# Altium PCB MT7688.PcbDoc (part 2 of 2)
Units mm, origin at the board's own origin, x right, y up, seen from the top; angles counter-clockwise.
Board outline 88.82 x 86.16 mm, 4 copper layers (Top Layer, GND, Layer 3, Bottom Layer), stack 0.603 mm thick; 138 components, 120 nets, 535 pads, 66 vias.
Unrouted connection lines stored in the file: 288.
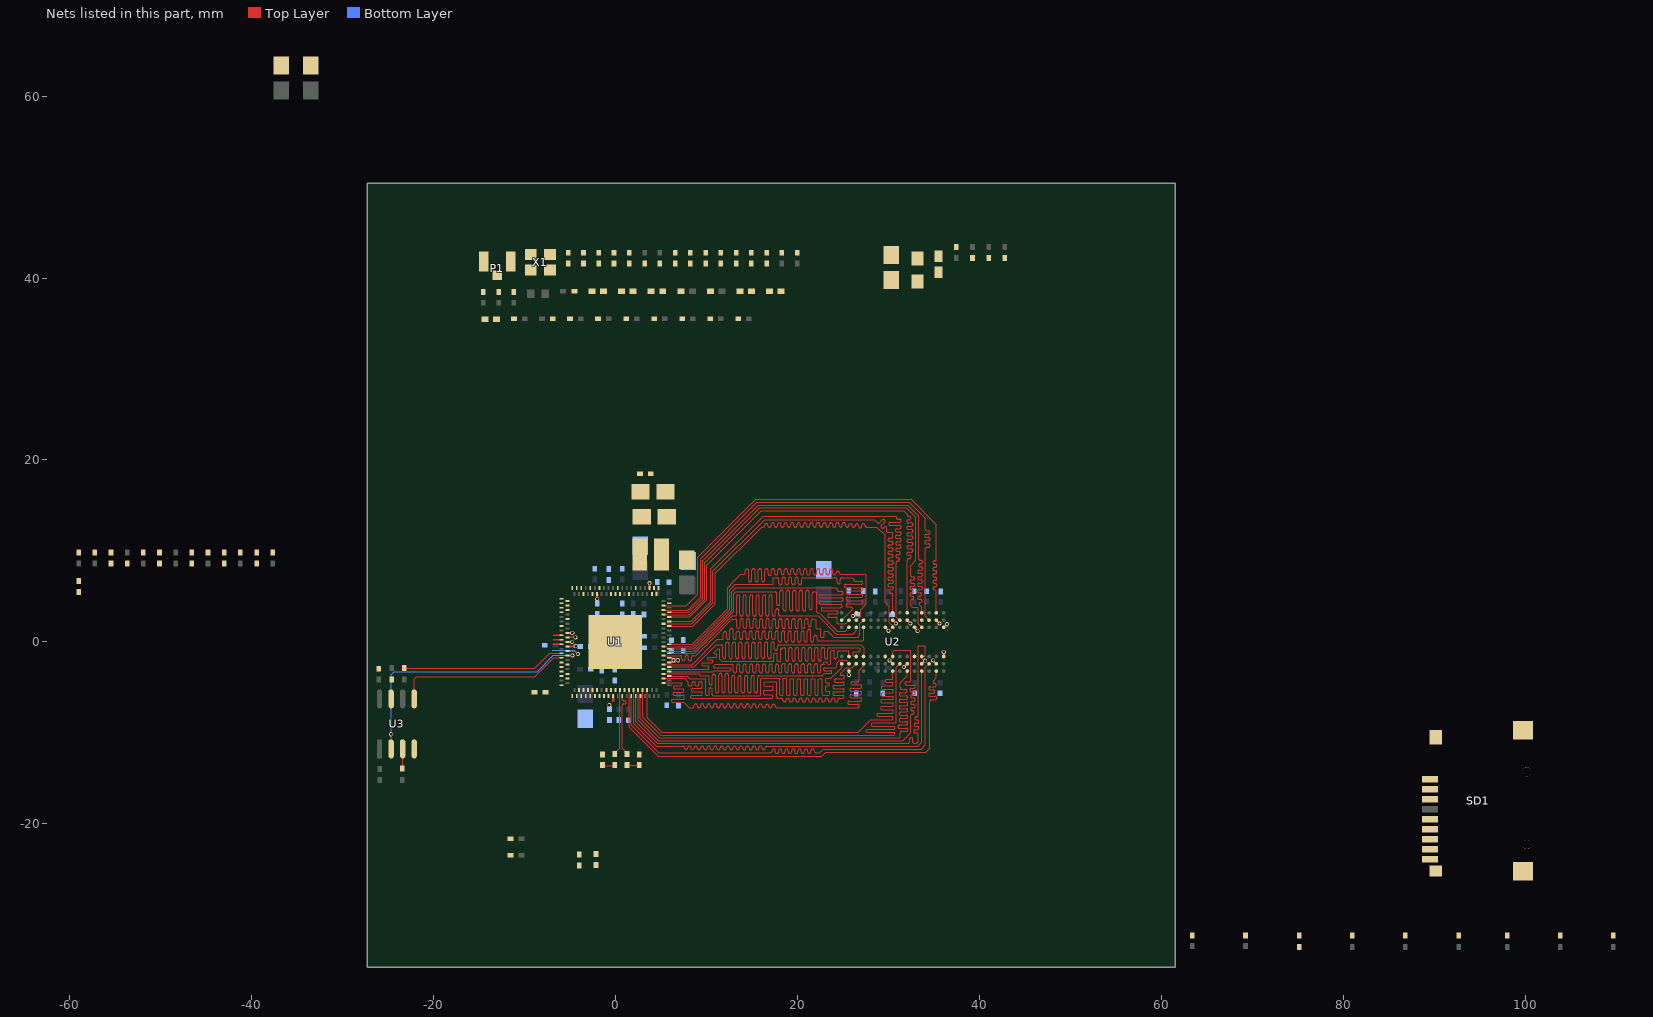
[diagram p3: the nets of this part, all layers, seen from the top]

## Via types
v1: diameter 0.45, hole 0.25, Top Layer to Bottom Layer, tented both sides, 66 vias

## Nets (pads, with @x,y where several pads share a name; then routed paths per layer and width w, separated by ;. In a path a pad name is that pad's centre, name@x,y a point inside that pad or via, vN(x,y) a via of type N, cw(c..) or ccw(c..) an arc to the next point about the centre after c; other vN are vias at no path point) (continued)
GND: C1.1 C2.1 C3.1 C4.2 C5.1 C6.1 C7.1 C8.1 C9.1 C12.1 C13.1 C14.1 C15.2 C18.2 C19.2 C20.2 C21.1 C22.1 C23.1 C24.2 C25.2 C26.2 C27.2 C28.2 C29.2 C30.2 C31.2 C32.2 C33.2 C34.2 C35.2 C36.2 C37.2 C38.2 C39.2 C40.2 C41.2 C42.2 C43.2 C44.2 C45.2 C46.2 C47.2 C48.2 C49.2 C50.2 C51.2 C52.2 C53.1 C54.2 C55.2 C56.2 C57.2 C59.2 C60.2 C61.2 C62.2 C63.2 C64.2 C65.2 C66.2 D2.K L3.2 P1.1 P1.3 R6.1 R9.1 R10.1 R11.1 R12.1 R15.2 R17.2 R26.1 R28.1 R31.1 R32.1 R34.1 R36.1 R38.1 SD1.0 SD1.6 TC1.2 TC2.2 TC3.2 TC4.2 TC5.2 TC6.2 TC7.2 TC8.2 TC9.2 TC10.2 U1.1 U1.2 U1.7 U1.10 U1.13 U1.63 U1.115 U1.120 U1.121 U1.128 U1.152 U1.156 U1.157 U2.A3 U2.A7 U2.B2 U2.B8 U2.D2 U2.D8 U2.E3 U2.E7 U2.F2 U2.F8 U2.H2 U2.H8 U2.J3 U2.J7 U2.N1 U2.P9 U3.4 X1.1 X1.2 X1.4 | length 6.3
  Top Layer w0.102: v1(25.663,-3.616) 25.68,-3.599 U2.P9@25.68,-3.2
  Top Layer w0.254: v1@26.135,2.855 U2.N1@26.48,3.2 ; U2.J3@29.68,1.6 v1@30.025,1.255 ; v1@30.135,-2.055 U2.H8@30.48,-2.4 ; U2.H2@30.48,2.4 v1@30.825,2.055 ; v1@31.735,-2.745 U2.F8@32.08,-2.4 ; U2.F2@32.08,2.4 32.425,2.055 v1(32.425,2.025) ; U2.E3@32.88,1.6 v1@33.225,1.255 ; U2.D8@33.68,-2.4 v1@34.025,-2.055 ; v1@34.935,-2.055 U2.B8@35.28,-2.4 ; U2.B2@35.28,2.4 35.621,2.059 v1(35.621,2.032) ; U2.A7@36.08,-1.6 v1@36.08,-1.112 ; U2.A3@36.08,1.6 v1@36.425,1.945
  other v1: 31.705,-2.745 34.055,-2.055 30.135,-2.025 34.935,-2.025 36.101,-1.091 30.025,1.225 33.225,1.225 36.455,1.945 30.825,2.025 26.105,2.855
GPIO_0: U1.29
I2C_SCLK: R5.1 U1.20 | length 0.5
  Top Layer w0.152: U1.20@-5.275,0 v1@-4.763,0
  other v1: -4.753,0.01
I2C_SD: R4.1 U1.21 | length 0.9
  Top Layer w0.152: -6.824,-0.251 -6.822,-0.25 U1.21@-5.925,-0.25
I2S_CLK: U1.19 | length 0.9
  Top Layer w0.152: -6.822,0.25 U1.19@-5.925,0.25
I2S_DI: U1.16 | length 0.5
  Top Layer w0.152: U1.16@-5.275,1 -5.265,0.99 -4.752,0.99 v1(-4.742,0.999)
I2S_DO: R37.2 R38.2 U1.17 | length 0.9
  Top Layer w0.152: -6.822,0.75 U1.17@-5.925,0.75
I2S_WS: U1.18 | length 0.9
  Top Layer w0.152: U1.18@-5.275,0.5 -4.41,0.5 v1@-4.407,0.497
  other v1: -4.397,0.503
MADDR0: U1.80 U2.M8 | length 50.8
  Top Layer w0.102: U1.80@5.275,-4.5 7.248,-4.5 7.308,-4.56 7.308,-4.782 7.248,-4.841 6.534,-4.841 ccw(c6.534,-4.943) 6.433,-4.943 6.433,-5.065 ccw(c6.534,-5.065) 6.534,-5.166 7.453,-5.166 7.512,-5.226 7.512,-5.487 7.453,-5.546 6.464,-5.546 ccw(c6.464,-5.648) 6.363,-5.648 6.363,-5.77 ccw(c6.464,-5.77) 6.464,-5.871 7.488,-5.871 cw(c7.488,-5.973) 7.59,-5.974 7.59,-6.198 cw(c7.488,-6.199) 7.488,-6.3 6.249,-6.3 6.19,-6.36 6.19,-6.566 6.249,-6.626 7.516,-6.626 7.675,-6.785 8.08,-7.19 ccw(c8.152,-7.118) 8.152,-7.22 8.442,-7.22 8.493,-7.22 ccw(c8.493,-7.042) 8.67,-7.042 8.67,-6.985 cw(c8.848,-6.985) 9.026,-6.985 9.026,-7.043 ccw(c9.204,-7.043) 9.382,-7.043 9.382,-6.985 cw(c9.559,-6.985) 9.737,-6.985 9.737,-7.043 ccw(c9.915,-7.043) 10.093,-7.043 10.093,-6.985 cw(c10.271,-6.985) 10.448,-6.985 10.448,-7.043 ccw(c10.626,-7.043) 10.804,-7.043 10.804,-6.985 cw(c10.982,-6.985) 11.16,-6.985 11.16,-7.043 ccw(c11.337,-7.043) 11.515,-7.043 11.515,-6.985 cw(c11.693,-6.985) 11.871,-6.985 11.871,-7.043 ccw(c12.049,-7.043) 12.226,-7.043 12.226,-6.985 cw(c12.404,-6.985) 12.582,-6.985 12.582,-7.043 ccw(c12.76,-7.043) 12.938,-7.043 12.938,-6.985 cw(c13.115,-6.985) 13.293,-6.985 13.293,-7.043 ccw(c13.471,-7.043) 13.649,-7.043 13.649,-6.985 cw(c13.827,-6.985) 14.004,-6.985 14.004,-7.043 ccw(c14.182,-7.043) 14.36,-7.043 14.36,-6.985 cw(c14.538,-6.985) 14.716,-6.985 14.716,-7.043 ccw(c14.893,-7.043) 15.071,-7.043 15.071,-6.985 cw(c15.249,-6.985) 15.427,-6.985 15.427,-7.043 ccw(c15.605,-7.043) 15.782,-7.043 15.782,-7.001 cw(c15.96,-7.001) 16.138,-7.001 16.138,-7.043 ccw(c16.316,-7.043) 16.494,-7.043 cw(c16.671,-7.043) 16.849,-7.043 ccw(c17.027,-7.043) 17.205,-7.043 ; 17.205,-7.042 cw(c17.383,-7.042) 17.56,-7.042 ccw(c17.738,-7.042) 17.738,-7.22 18.376,-7.22 26.694,-7.22 ccw(c26.694,-7.118) 26.781,-7.172 ccw(c26.694,-7.118) 26.796,-7.121 26.796,-7.118 26.796,-7.032 ccw(c26.618,-7.032) 26.618,-6.854 25.705,-6.854 cw(c25.705,-6.676) 25.705,-6.499 26.929,-6.499 ccw(c26.929,-6.321) 26.929,-6.143 25.952,-6.143 cw(c25.952,-5.965) 25.952,-5.787 26.929,-5.787 ccw(c26.929,-5.61) 26.929,-5.432 25.952,-5.432 cw(c25.952,-5.254) 25.952,-5.076 26.929,-5.076 ccw(c26.929,-4.898) 26.929,-4.721 26.076,-4.721 cw(c26.076,-4.543) 26.076,-4.365 26.618,-4.365 ccw(c26.618,-4.187) 26.796,-4.187 26.796,-3.171 cw(c26.897,-3.171) 26.802,-3.137 cw(c26.897,-3.171) 26.825,-3.1 27.193,-2.732 ccw(c27.121,-2.66) 27.223,-2.66 27.223,-2.457 U2.M8@27.28,-2.4
MADDR1: U1.88 U2.M3 | length 50.8
  Top Layer w0.102: U1.88@5.276,-2.499 8.425,-2.499 11.203,0.279 11.643,0.279 11.694,0.279 ccw(c11.694,0.456) 11.872,0.456 11.872,0.953 cw(c12.05,0.953) 12.228,0.953 12.228,0.456 ccw(c12.405,0.456) 12.583,0.456 12.583,1.308 cw(c12.761,1.308) 12.939,1.308 12.939,0.456 ccw(c13.117,0.456) 13.294,0.456 13.294,1.01 cw(c13.472,1.01) 13.65,1.01 13.65,0.456 ccw(c13.828,0.456) 14.006,0.456 14.006,1.01 cw(c14.183,1.01) 14.361,1.01 14.361,0.456 ccw(c14.539,0.456) 14.717,0.456 14.717,1.01 cw(c14.895,1.01) 15.072,1.01 15.072,0.456 ccw(c15.25,0.456) 15.428,0.456 15.428,1.01 cw(c15.606,1.01) 15.784,1.01 15.784,0.456 ccw(c15.961,0.456) 16.139,0.456 16.139,1.01 cw(c16.317,1.01) 16.495,1.01 16.495,0.456 ccw(c16.673,0.456) 16.85,0.456 16.85,1.01 cw(c17.028,1.01) 17.206,1.01 17.206,0.456 ccw(c17.384,0.456) 17.562,0.456 17.562,1.01 cw(c17.739,1.01) 17.917,1.01 17.917,0.17 ccw(c18.095,0.17) 18.273,0.17 18.273,1.01 cw(c18.451,1.01) 18.628,1.01 18.628,0.17 ccw(c18.806,0.17) 18.984,0.17 18.984,1.01 cw(c19.162,1.01) 19.34,1.01 19.34,0.17 ccw(c19.517,0.17) 19.695,0.17 19.695,1.01 cw(c19.873,1.01) 20.051,1.01 20.051,0.17 ccw(c20.229,0.17) 20.406,0.17 20.406,1.01 cw(c20.584,1.01) 20.762,1.01 20.762,0.17 ccw(c20.94,0.17) 21.118,0.17 21.118,1.201 cw(c21.295,1.201) 21.473,1.201 21.473,0.17 ccw(c21.651,0.17) 21.829,0.17 21.829,0.536 cw(c22.007,0.536) 22.184,0.536 22.184,0.292 ccw(c22.362,0.292) 22.362,0.114 23.66,0.114 27.205,0.114 27.28,0.189 U2.M3@27.28,1.6
MADDR2: U1.87 U2.M7 | length 50.8
  Top Layer w0.102: U1.87@5.925,-2.75 8.674,-2.75 11.112,-0.312 11.209,-0.312 ; 11.21,-0.312 11.616,-0.312 cw(c11.616,-0.49) 11.794,-0.49 11.794,-1.654 ccw(c11.971,-1.654) 12.149,-1.654 12.149,-0.204 cw(c12.327,-0.204) 12.505,-0.204 12.505,-1.654 ccw(c12.683,-1.654) 12.86,-1.654 12.86,-0.204 cw(c13.038,-0.204) 13.216,-0.204 13.216,-1.654 ccw(c13.394,-1.654) 13.572,-1.654 13.572,-0.204 cw(c13.749,-0.204) 13.927,-0.204 13.927,-1.654 ccw(c14.105,-1.654) 14.283,-1.654 14.283,-0.204 cw(c14.461,-0.204) 14.638,-0.204 14.638,-1.654 ccw(c14.816,-1.654) 14.994,-1.654 14.994,-0.204 cw(c15.172,-0.204) 15.35,-0.204 15.35,-1.654 ccw(c15.527,-1.654) 15.705,-1.654 15.705,-0.204 cw(c15.883,-0.204) 16.061,-0.204 16.061,-1.654 ccw(c16.239,-1.654) 16.416,-1.654 16.416,-0.204 cw(c16.594,-0.204) 16.772,-0.204 16.772,-1.654 ccw(c16.95,-1.654) 17.128,-1.654 17.128,-0.204 cw(c17.305,-0.204) 17.483,-0.204 17.483,-0.734 ccw(c17.661,-0.734) 17.839,-0.734 17.839,-0.49 cw(c18.017,-0.49) 18.017,-0.312 19.243,-0.312 26.991,-0.312 27.25,-0.571 cw(c27.178,-0.643) 27.28,-0.643 U2.M7@27.28,-1.6
MADDR3: U1.97 U2.N2 | length 50.8
  Top Layer w0.102: U1.97@5.925,-0.25 5.938,-0.263 8.429,-0.263 12.332,3.64 12.332,5.983 13.016,6.667 13.786,7.437 14.072,7.437 14.122,7.437 ccw(c14.122,7.615) 14.3,7.615 14.3,7.835 cw(c14.478,7.835) 14.656,7.835 14.656,6.816 ccw(c14.834,6.816) 15.011,6.816 15.011,7.869 cw(c15.189,7.869) 15.367,7.869 15.367,6.816 ccw(c15.545,6.816) 15.723,6.816 15.723,7.869 cw(c15.9,7.869) 16.078,7.869 16.078,6.816 ccw(c16.256,6.816) 16.434,6.816 16.434,7.869 cw(c16.612,7.869) 16.789,7.869 16.789,7.484 ccw(c16.967,7.484) 17.145,7.484 17.145,7.869 cw(c17.323,7.869) 17.501,7.869 17.501,7.559 ccw(c17.678,7.559) 17.856,7.559 17.856,7.869 cw(c18.034,7.869) 18.212,7.869 18.212,7.589 ccw(c18.39,7.589) 18.567,7.589 18.567,7.869 cw(c18.745,7.869) 18.923,7.869 18.923,7.589 ccw(c19.101,7.589) 19.279,7.589 19.279,7.869 cw(c19.456,7.869) 19.634,7.869 19.634,7.589 ccw(c19.812,7.589) 19.99,7.589 19.99,7.869 cw(c20.168,7.869) 20.345,7.869 20.345,7.559 ccw(c20.523,7.559) 20.701,7.559 20.701,7.869 cw(c20.879,7.869) 21.057,7.869 21.057,7.559 ccw(c21.234,7.559) 21.412,7.559 21.412,7.869 cw(c21.59,7.869) 21.768,7.869 21.768,7.559 ccw(c21.946,7.559) 22.123,7.559 22.123,7.869 cw(c22.301,7.869) 22.479,7.869 22.479,7.559 ccw(c22.657,7.559) 22.835,7.559 22.835,7.869 cw(c23.012,7.869) 23.19,7.869 23.19,7.559 ccw(c23.368,7.559) 23.546,7.559 23.546,7.835 cw(c23.724,7.835) 23.901,7.835 23.901,7.559 ccw(c24.079,7.559) 24.257,7.559 24.257,7.615 cw(c24.435,7.615) 24.613,7.615 ccw(c24.79,7.615) 24.79,7.437 26.387,7.438 26.438,7.438 27.602,7.438 27.602,4.217 26.948,3.562 26.948,2.868 U2.N2@26.48,2.4
MADDR4: U1.82 U2.N8 | length 51.1
  Top Layer w0.102: U1.82@5.275,-4 7.621,-4 8.03,-4.409 8.03,-4.728 ccw(c8.132,-4.728) 8.132,-4.83 8.325,-4.83 ccw(c8.325,-4.728) 8.427,-4.728 8.427,-4.459 cw(c8.529,-4.459) 8.529,-4.357 8.689,-4.357 cw(c8.689,-4.459) 8.791,-4.459 8.791,-4.732 ccw(c8.893,-4.731) 8.893,-4.832 9.061,-4.832 ccw(c9.061,-4.731) 9.163,-4.731 9.163,-4.473 cw(c9.265,-4.473) 9.265,-4.371 9.426,-4.371 cw(c9.426,-4.473) 9.528,-4.473 9.528,-4.999 cw(c9.426,-4.999) 9.426,-5.1 8.479,-5.1 ccw(c8.479,-5.202) 8.377,-5.202 8.377,-5.38 ccw(c8.479,-5.38) 8.479,-5.481 9.487,-5.481 9.547,-5.541 9.547,-5.781 9.487,-5.841 8.414,-5.841 ccw(c8.414,-5.942) 8.312,-5.942 8.312,-6.096 ccw(c8.414,-6.095) 8.414,-6.197 10.763,-6.197 15.865,-6.197 17.19,-6.196 ccw(c17.189,-6.095) 17.291,-6.097 17.291,-5.886 17.189,-5.785 16.42,-5.785 cw(c16.42,-5.683) 16.318,-5.683 16.318,-5.424 cw(c16.42,-5.424) 16.42,-5.323 17.234,-5.323 ccw(c17.234,-5.221) 17.335,-5.22 17.335,-4.994 17.234,-4.892 16.42,-4.892 16.36,-4.833 16.36,-4.454 16.42,-4.394 17.65,-4.394 17.752,-4.496 17.752,-6.096 ccw(c17.854,-6.096) 17.849,-6.197 ccw(c17.854,-6.096) 17.854,-6.197 17.899,-6.197 18.242,-6.197 cw(c18.242,-6.375) 18.42,-6.375 18.42,-6.386 ccw(c18.598,-6.386) 18.776,-6.386 18.776,-6.375 cw(c18.953,-6.375) 19.131,-6.375 19.131,-6.418 ccw(c19.309,-6.418) 19.487,-6.418 19.487,-6.375 cw(c19.665,-6.375) 19.842,-6.375 19.842,-6.418 ccw(c20.02,-6.418) 20.198,-6.418 20.198,-6.375 cw(c20.376,-6.375) 20.554,-6.375 20.554,-6.418 ccw(c20.731,-6.418) 20.909,-6.418 20.909,-6.375 cw(c21.087,-6.375) 21.265,-6.375 21.265,-6.418 ccw(c21.443,-6.418) 21.62,-6.418 21.62,-6.375 cw(c21.798,-6.375) 21.976,-6.375 21.976,-6.418 ccw(c22.154,-6.418) 22.332,-6.418 22.332,-6.375 cw(c22.509,-6.375) 22.687,-6.375 22.687,-6.418 ccw(c22.865,-6.418) 23.043,-6.418 23.043,-6.375 cw(c23.221,-6.375) 23.398,-6.375 23.398,-6.418 ccw(c23.576,-6.418) 23.754,-6.418 23.754,-6.36 cw(c23.932,-6.36) 24.11,-6.36 24.11,-6.418 ccw(c24.287,-6.418) 24.465,-6.418 24.465,-6.375 cw(c24.643,-6.375) 24.643,-6.197 24.694,-6.197 24.967,-6.197 25.149,-6.016 ; 25.149,-6.066 25.149,-6.016 ; 25.149,-3.633 25.149,-3.882 ; 25.701,-2.848 26.032,-2.848 U2.N8@26.48,-2.4 ; 25.701,-2.845 25.361,-2.845 24.721,-3.484 ccw(c24.793,-3.556) 24.793,-3.658 24.97,-3.658 cw(c24.971,-3.911) 25.101,-3.694 cw(c25.048,-3.781) 25.15,-3.781 25.15,-3.866 cw(c25.048,-3.866) 25.149,-3.882 ; 25.149,-6.016 ccw(c24.971,-6.016) 24.971,-5.838 24.056,-5.838 cw(c24.056,-5.66) 24.056,-5.482 24.987,-5.482 ccw(c24.987,-5.304) 24.987,-5.127 24.056,-5.127 cw(c24.056,-4.949) 24.056,-4.771 24.987,-4.771 ccw(c24.987,-4.593) 24.987,-4.415 24.252,-4.415 cw(c24.252,-4.238) 24.252,-4.06 24.971,-4.06 ccw(c24.971,-3.882) 25.149,-3.882
MADDR5: U1.93 U2.N3 | length 50.8
  Top Layer w0.102: U1.93@5.925,-1.25 8.737,-1.25 12.84,2.854 13.105,2.854 13.156,2.854 ccw(c13.156,3.031) 13.334,3.031 13.334,4.979 cw(c13.511,4.979) 13.689,4.979 13.689,3.022 ccw(c13.867,3.022) 14.045,3.022 14.045,4.982 cw(c14.223,4.982) 14.4,4.982 14.4,3.022 ccw(c14.578,3.022) 14.756,3.022 14.756,4.982 cw(c14.934,4.982) 15.112,4.982 15.112,3.022 ccw(c15.289,3.022) 15.467,3.022 15.467,4.982 cw(c15.645,4.982) 15.823,4.982 15.823,3.022 ccw(c16.001,3.022) 16.178,3.022 16.178,4.982 cw(c16.356,4.982) 16.534,4.982 16.534,3.022 ccw(c16.712,3.022) 16.89,3.022 16.89,4.982 cw(c17.067,4.982) 17.245,4.982 17.245,3.022 ccw(c17.423,3.022) 17.601,3.022 17.601,3.45 cw(c17.779,3.45) 17.956,3.45 17.956,3.031 ccw(c18.134,3.031) 18.134,2.854 18.482,2.854 22.288,2.854 24.298,0.845 26.082,0.845 26.48,1.243 U2.N3@26.48,1.6
MADDR6: U1.86 U2.N7 | length 51.1
  Top Layer w0.102: U1.86@5.275,-3 5.276,-3.001 10.207,-3.001 10.267,-2.941 10.267,-2.671 10.207,-2.611 9.61,-2.611 9.55,-2.552 9.55,-2.363 9.61,-2.304 10.667,-2.304 10.726,-2.244 10.726,-2.029 10.667,-1.97 10.195,-1.97 10.136,-1.91 10.136,-1.719 10.195,-1.66 11.096,-1.66 11.156,-1.6 11.156,-1.342 11.096,-1.283 10.908,-1.283 10.848,-1.223 10.848,-1.139 11.232,-0.756 11.429,-0.756 11.489,-0.815 11.489,-1.884 11.742,-2.137 17.401,-2.137 17.432,-2.105 17.432,-1.276 17.492,-1.217 17.728,-1.217 17.788,-1.276 17.788,-2.087 17.847,-2.146 18.115,-2.146 18.175,-2.087 18.175,-0.718 18.261,-0.631 18.44,-0.631 ; 18.229,-0.843 18.44,-0.631 ; U2.N7@26.48,-1.6 26.447,-1.567 26.209,-1.567 26.149,-1.508 26.149,-1.135 26.212,-1.073 26.843,-1.073 26.902,-1.014 26.902,-0.765 26.769,-0.631 25.793,-0.631 24.138,-0.631 23.525,-0.631 ccw(c23.525,-0.809) 23.347,-0.809 23.347,-1.674 cw(c23.169,-1.674) 22.991,-1.674 22.991,-0.795 ccw(c22.813,-0.795) 22.636,-0.795 22.636,-1.924 cw(c22.458,-1.924) 22.28,-1.924 22.28,-0.795 ccw(c22.102,-0.795) 21.924,-0.795 21.924,-1.924 cw(c21.747,-1.924) 21.569,-1.924 21.569,-0.795 ccw(c21.391,-0.795) 21.213,-0.795 21.213,-1.924 cw(c21.035,-1.924) 20.858,-1.924 20.858,-0.795 ccw(c20.68,-0.795) 20.502,-0.795 20.502,-1.924 cw(c20.324,-1.924) 20.146,-1.924 20.146,-0.795 ccw(c19.969,-0.795) 19.791,-0.795 19.791,-1.924 cw(c19.613,-1.924) 19.435,-1.924 19.435,-0.795 ccw(c19.257,-0.795) 19.08,-0.795 19.08,-1.924 cw(c18.902,-1.924) 18.724,-1.924 18.724,-0.809 ccw(c18.546,-0.809) 18.546,-0.631 18.44,-0.631
MADDR7: U1.95 U2.P2 | length 44
  Top Layer w0.102: U1.95@5.925,-0.75 5.932,-0.743 8.596,-0.743 12.789,3.45 12.789,5.535 13.232,5.978 21.028,5.978 24.296,5.978 24.347,5.978 24.407,5.918 24.407,5.791 24.407,5.74 ccw(c24.585,5.74) 24.585,5.563 24.864,5.563 cw(c24.864,5.385) 24.864,5.207 22.596,5.207 ccw(c22.596,5.029) 22.596,4.851 24.864,4.851 cw(c24.864,4.674) 24.864,4.496 22.596,4.496 ccw(c22.596,4.318) 22.596,4.14 24.748,4.14 cw(c24.748,3.962) 24.748,3.785 22.789,3.785 ccw(c22.789,3.607) 22.789,3.429 24.321,3.429 cw(c24.321,3.251) 24.321,3.073 23.501,3.073 ccw(c23.501,2.896) 23.501,2.718 24.229,2.718 cw(c24.229,2.54) 24.407,2.54 24.407,2.196 24.407,2.042 24.466,1.982 25.262,1.982 U2.P2@25.68,2.4
MADDR8: U1.84 U2.P8 | length 50.8
  Top Layer w0.102: U1.84@5.275,-3.5 9.192,-3.5 9.39,-3.698 9.859,-3.698 10.126,-3.698 cw(c10.126,-3.876) 10.304,-3.876 10.304,-4.538 ccw(c10.482,-4.538) 10.66,-4.538 10.66,-3.733 cw(c10.837,-3.733) 11.015,-3.733 11.015,-5.407 ccw(c11.193,-5.407) 11.371,-5.407 11.371,-3.64 cw(c11.549,-3.64) 11.726,-3.64 11.726,-5.407 ccw(c11.904,-5.407) 12.082,-5.407 12.082,-3.64 cw(c12.26,-3.64) 12.438,-3.64 12.438,-5.407 ccw(c12.615,-5.407) 12.793,-5.407 12.793,-3.877 cw(c12.971,-3.877) 13.149,-3.877 13.149,-5.407 ccw(c13.327,-5.407) 13.504,-5.407 13.504,-3.877 cw(c13.682,-3.877) 13.86,-3.877 13.86,-5.407 ccw(c14.038,-5.407) 14.216,-5.407 14.216,-3.877 cw(c14.393,-3.877) 14.571,-3.877 14.571,-5.407 ccw(c14.749,-5.407) 14.927,-5.407 14.927,-3.877 cw(c15.105,-3.877) 15.282,-3.877 15.282,-5.407 ccw(c15.46,-5.407) 15.638,-5.407 15.638,-3.876 cw(c15.816,-3.876) 15.816,-3.698 15.867,-3.698 15.978,-3.698 cw(c15.978,-3.8) 15.982,-3.698 ccw(c16.004,-3.216) 16.025,-3.698 cw(c16.03,-3.8) 16.03,-3.698 16.689,-3.698 cw(c16.689,-3.8) 16.694,-3.698 ccw(c16.715,-3.216) 16.737,-3.698 cw(c16.741,-3.8) 16.741,-3.698 17.4,-3.698 cw(c17.4,-3.8) 17.405,-3.698 ccw(c17.426,-3.216) 17.448,-3.698 cw(c17.452,-3.8) 17.452,-3.698 18.112,-3.698 cw(c18.112,-3.8) 18.116,-3.698 ccw(c18.138,-3.216) 18.159,-3.698 cw(c18.164,-3.8) 18.164,-3.698 18.823,-3.698 cw(c18.823,-3.8) 18.827,-3.698 ccw(c18.849,-3.216) 18.87,-3.698 cw(c18.875,-3.8) 18.875,-3.698 19.534,-3.698 cw(c19.534,-3.8) 19.538,-3.698 ccw(c19.56,-3.216) 19.581,-3.698 cw(c19.586,-3.8) 19.586,-3.698 20.245,-3.698 cw(c20.245,-3.8) 20.25,-3.698 ccw(c20.271,-3.216) 20.293,-3.698 cw(c20.297,-3.8) 20.297,-3.698 20.956,-3.698 cw(c20.956,-3.8) 20.961,-3.698 ccw(c20.982,-3.216) 21.004,-3.698 cw(c21.008,-3.8) 21.008,-3.698 21.668,-3.698 cw(c21.668,-3.8) 21.672,-3.698 ccw(c21.694,-3.216) 21.715,-3.698 cw(c21.72,-3.8) 21.72,-3.698 22.379,-3.698 cw(c22.379,-3.8) 22.383,-3.698 ccw(c22.405,-3.216) 22.426,-3.698 cw(c22.431,-3.8) 22.431,-3.698 22.705,-3.698 ccw(c22.705,-3.597) 22.777,-3.668 22.978,-3.467 23.686,-3.467 ccw(c23.686,-3.365) 23.788,-3.365 23.788,-3.262 ccw(c23.686,-3.261) 23.686,-3.16 23.026,-3.16 cw(c23.026,-3.058) 22.925,-3.058 22.925,-2.912 cw(c23.026,-2.912) 23.026,-2.811 24.256,-2.811 24.333,-2.733 24.333,-2.323 24.661,-1.995 25.362,-1.995 25.479,-2.112 25.479,-2.118 25.68,-2.319 U2.P8@25.68,-2.4
MADDR9: U1.94 U2.P3 | length 50.8
  Top Layer w0.102: U1.94@5.275,-1 8.662,-1 13.018,3.356 13.018,5.272 13.249,5.503 16.441,5.503 17.559,5.503 cw(c17.559,5.325) 17.737,5.325 17.737,4.193 ccw(c17.915,4.193) 18.092,4.193 18.092,5.495 cw(c18.27,5.495) 18.448,5.495 18.448,3.603 ccw(c18.626,3.603) 18.804,3.603 18.804,5.495 cw(c18.981,5.495) 19.159,5.495 19.159,3.603 ccw(c19.337,3.603) 19.515,3.603 19.515,5.495 cw(c19.693,5.495) 19.87,5.495 19.87,3.603 ccw(c20.048,3.603) 20.226,3.603 20.226,5.495 cw(c20.404,5.495) 20.582,5.495 20.582,3.603 ccw(c20.759,3.603) 20.937,3.603 20.937,5.495 cw(c21.115,5.495) 21.293,5.495 21.293,3.739 ccw(c21.471,3.739) 21.648,3.739 21.648,5.325 cw(c21.826,5.325) 21.826,5.503 22.054,5.503 22.111,5.446 22.113,5.443 22.113,3.26 22.173,3.2 22.409,3.2 24.409,1.2 25.28,1.2 U2.P3@25.68,1.6
MADDR10: U1.92 U2.M2 | length 50.8
  Top Layer w0.102: U1.92@5.275,-1.5 6.732,-1.5 7.139,-1.5 cw(c7.139,-1.678) 7.316,-1.678 7.316,-1.894 ccw(c7.494,-1.894) 7.672,-1.894 7.672,-1.634 cw(c7.85,-1.634) 8.028,-1.634 8.028,-1.894 ccw(c8.205,-1.894) 8.383,-1.894 8.383,-1.678 cw(c8.561,-1.678) 8.561,-1.5 8.81,-1.5 8.977,-1.333 10.904,0.594 12.151,1.841 12.818,2.508 13.18,2.508 cw(c13.18,2.33) 13.358,2.33 13.358,1.67 ccw(c13.536,1.67) 13.713,1.67 13.713,2.362 cw(c13.891,2.362) 14.069,2.362 14.069,1.67 ccw(c14.247,1.67) 14.425,1.67 14.425,2.362 cw(c14.602,2.362) 14.78,2.362 14.78,1.67 ccw(c14.958,1.67) 15.136,1.67 15.136,2.362 cw(c15.314,2.362) 15.491,2.362 15.491,1.67 ccw(c15.669,1.67) 15.847,1.67 15.847,2.362 cw(c16.025,2.362) 16.203,2.362 16.203,1.67 ccw(c16.38,1.67) 16.558,1.67 16.558,2.362 cw(c16.736,2.362) 16.914,2.362 16.914,1.67 ccw(c17.092,1.67) 17.269,1.67 17.269,2.362 cw(c17.447,2.362) 17.625,2.362 17.625,1.67 ccw(c17.803,1.67) 17.981,1.67 17.981,2.371 cw(c18.158,2.371) 18.336,2.371 18.336,1.67 ccw(c18.514,1.67) 18.692,1.67 18.692,2.371 cw(c18.87,2.371) 19.047,2.371 19.047,1.67 ccw(c19.225,1.67) 19.403,1.67 19.403,2.371 cw(c19.581,2.371) 19.759,2.371 19.759,1.67 ccw(c19.936,1.67) 20.114,1.67 20.114,2.371 cw(c20.292,2.371) 20.47,2.371 20.47,1.67 ccw(c20.648,1.67) 20.825,1.67 20.825,2.371 cw(c21.003,2.371) 21.181,2.371 21.181,1.87 ccw(c21.359,1.87) 21.537,1.87 21.537,2.33 cw(c21.714,2.33) 21.714,2.508 21.949,2.508 21.972,2.508 22.054,2.427 22.054,1.492 22.113,1.433 22.52,1.433 22.579,1.373 22.579,0.58 22.639,0.521 22.892,0.521 22.951,0.58 22.951,1.142 23.011,1.201 23.336,1.201 24.023,0.514 26.687,0.514 26.882,0.71 26.882,2.002 U2.M2@27.28,2.4
MADDR11: U1.85 U2.P7 | length 51
  Top Layer w0.102: U1.85@5.925,-3.25 10.735,-3.25 10.828,-3.157 12.605,-3.157 12.664,-3.098 12.664,-2.874 12.605,-2.814 10.853,-2.814 10.794,-2.755 10.794,-2.671 11.002,-2.463 12.397,-2.462 12.448,-2.462 12.803,-2.462 cw(c12.804,-2.64) 12.981,-2.64 12.981,-3.216 ccw(c13.159,-3.216) 13.337,-3.216 13.337,-2.619 cw(c13.515,-2.619) 13.693,-2.619 13.693,-3.216 ccw(c13.87,-3.216) 14.048,-3.216 14.048,-2.619 cw(c14.226,-2.619) 14.404,-2.619 14.404,-3.216 ccw(c14.582,-3.216) 14.759,-3.216 14.759,-2.619 cw(c14.937,-2.619) 15.115,-2.619 15.115,-3.216 ccw(c15.293,-3.216) 15.471,-3.216 15.471,-2.619 cw(c15.648,-2.619) 15.826,-2.619 15.826,-3.216 ccw(c16.004,-3.216) 16.182,-3.216 16.182,-2.619 cw(c16.36,-2.619) 16.537,-2.619 16.537,-3.216 ccw(c16.715,-3.216) 16.893,-3.216 16.893,-2.619 cw(c17.071,-2.619) 17.249,-2.619 17.249,-3.216 ccw(c17.426,-3.216) 17.604,-3.216 17.604,-2.629 cw(c17.782,-2.629) 17.96,-2.629 17.96,-3.216 ccw(c18.138,-3.216) 18.315,-3.216 18.315,-2.554 cw(c18.493,-2.554) 18.671,-2.554 18.671,-3.216 ccw(c18.849,-3.216) 19.027,-3.216 19.027,-2.58 cw(c19.204,-2.58) 19.382,-2.58 19.382,-3.216 ccw(c19.56,-3.216) 19.738,-3.216 19.738,-2.58 cw(c19.916,-2.58) 20.093,-2.58 20.093,-3.216 ccw(c20.271,-3.216) 20.449,-3.216 20.449,-2.58 cw(c20.627,-2.58) 20.805,-2.58 20.805,-3.216 ccw(c20.982,-3.216) 21.16,-3.216 21.16,-2.58 cw(c21.338,-2.58) 21.516,-2.58 21.516,-3.216 ccw(c21.694,-3.216) 21.871,-3.216 21.871,-2.58 cw(c22.049,-2.58) 22.227,-2.58 22.227,-3.216 ccw(c22.405,-3.216) 22.583,-3.216 22.583,-2.633 cw(c22.76,-2.633) 22.76,-2.455 22.948,-2.455 22.998,-2.455 ; 22.84,-2.455 22.931,-2.364 22.931,-2.245 22.991,-2.186 23.256,-2.186 23.316,-2.245 23.316,-2.374 23.375,-2.433 23.613,-2.433 23.673,-2.374 23.673,-0.996 23.732,-0.936 23.987,-0.936 24.046,-0.996 24.046,-1.782 24.106,-1.841 24.242,-1.841 24.439,-1.645 24.439,-1.029 24.498,-0.969 25.61,-0.969 25.669,-1.029 25.669,-1.589 U2.P7@25.68,-1.6
MADDR12: U1.96 U2.R2 | length 50.8
  Top Layer w0.102: U1.96@5.275,-0.5 5.283,-0.508 8.507,-0.508 12.56,3.545 12.56,5.743 13.151,6.333 17.286,6.333 17.345,6.393 17.345,7.076 17.388,7.076 17.795,7.076 cw(c17.795,6.899) 17.973,6.899 17.973,6.46 ccw(c18.15,6.46) 18.328,6.46 18.328,6.929 cw(c18.506,6.929) 18.684,6.929 18.684,6.46 ccw(c18.862,6.46) 19.039,6.46 19.039,6.929 cw(c19.217,6.929) 19.395,6.929 19.395,6.46 ccw(c19.573,6.46) 19.751,6.46 19.751,6.929 cw(c19.928,6.929) 20.106,6.929 20.106,6.46 ccw(c20.284,6.46) 20.462,6.46 20.462,6.899 cw(c20.64,6.899) 20.64,7.076 24.196,7.076 cw(c24.196,6.899) 24.373,6.899 24.373,6.568 ccw(c24.551,6.568) 24.729,6.568 24.729,6.899 cw(c24.907,6.899) 24.907,7.076 25.178,7.076 26.109,7.076 26.176,7.009 26.176,6.915 26.176,6.864 ccw(c26.354,6.864) 26.354,6.687 27.014,6.687 cw(c27.014,6.509) 27.014,6.331 25.338,6.331 ccw(c25.338,6.153) 25.338,5.975 27.014,5.975 cw(c27.014,5.798) 27.014,5.62 25.54,5.62 ccw(c25.54,5.442) 25.54,5.264 27.014,5.264 cw(c27.014,5.086) 27.014,4.909 25.54,4.909 ccw(c25.54,4.731) 25.54,4.553 27.014,4.553 cw(c27.014,4.375) 27.014,4.197 25.54,4.197 ccw(c25.54,4.02) 25.54,3.842 25.893,3.842 cw(c25.893,3.664) 26.018,3.538 25.203,2.723 U2.R2@24.88,2.4
MADDR13: U1.83 U2.R8 | length 50.8
  Top Layer w0.102: U1.83@5.925,-3.75 7.881,-3.75 8.181,-4.05 9.888,-4.05 9.957,-4.118 9.957,-5.785 ccw(c10.058,-5.785) 10.058,-5.886 10.21,-5.886 ccw(c10.21,-5.785) 10.311,-5.785 10.311,-5.137 cw(c10.413,-5.137) 10.413,-5.036 10.56,-5.036 10.662,-5.137 10.662,-5.791 ccw(c10.763,-5.791) 10.763,-5.893 15.865,-5.892 ccw(c15.865,-5.79) 15.966,-5.792 15.966,-4.119 cw(c16.068,-4.119) 16.003,-4.041 cw(c16.068,-4.119) 16.02,-4.029 16.032,-4.017 17.997,-4.017 18.057,-4.077 18.057,-5.775 18.116,-5.834 18.38,-5.834 18.439,-5.775 18.439,-4.066 18.499,-4.007 18.774,-4.007 18.834,-4.066 18.834,-5.784 18.893,-5.843 19.157,-5.843 19.216,-5.784 19.216,-4.085 19.28,-4.022 19.512,-4.022 ; 19.531,-4.023 19.591,-4.083 19.591,-5.781 19.65,-5.841 19.914,-5.841 19.973,-5.781 19.973,-4.087 20.033,-4.027 20.305,-4.027 20.364,-4.087 20.364,-5.781 20.424,-5.841 20.687,-5.841 20.747,-5.781 20.747,-4.102 20.806,-4.042 21.079,-4.042 21.139,-4.102 21.139,-5.781 21.198,-5.841 21.462,-5.841 21.521,-5.781 21.521,-4.106 21.581,-4.046 21.885,-4.046 21.944,-4.106 21.944,-5.8 22.004,-5.86 22.267,-5.86 22.326,-5.8 22.326,-4.108 22.386,-4.049 22.683,-4.049 22.743,-4.108 22.743,-5.775 22.803,-5.834 23.505,-5.834 23.565,-5.775 23.565,-5.501 23.505,-5.442 23.195,-5.442 23.136,-5.382 23.136,-4.899 23.195,-4.84 23.442,-4.84 23.501,-4.78 23.501,-4.539 23.442,-4.479 23.203,-4.479 23.143,-4.42 23.143,-4.07 23.203,-4.011 23.692,-4.011 24.88,-2.823 U2.R8@24.88,-2.4
MDATA0: U1.71 U2.G8 | length 50.8
  Top Layer w0.102: U1.71@3,-5.275 3.009,-5.284 3.009,-8.263 4.977,-10.231 30.667,-10.231 30.726,-10.172 30.726,-9.967 30.667,-9.907 27.616,-9.907 27.556,-9.848 27.556,-9.659 27.616,-9.6 30.676,-9.6 30.735,-9.54 30.735,-9.315 30.676,-9.256 28.234,-9.256 28.175,-9.196 28.175,-8.963 28.234,-8.904 30.827,-8.904 30.886,-8.844 30.886,-2.794 U2.G8@31.28,-2.4
MDATA1: U1.107 U2.G2 | length 50.7
  Top Layer w0.102: U1.107@5.925,2.25 8.345,2.25 10.503,4.408 10.503,8.02 16.279,13.796 30.799,13.796 30.852,13.743 30.881,13.713 30.881,13.692 ccw(c31.059,13.692) 31.059,13.514 31.241,13.514 cw(c31.241,13.336) 31.241,13.158 30.227,13.158 ccw(c30.227,12.981) 30.227,12.803 31.241,12.803 cw(c31.241,12.625) 31.241,12.447 30.951,12.447 ccw(c30.951,12.269) 30.951,12.092 31.241,12.092 cw(c31.241,11.914) 31.241,11.736 30.954,11.736 ccw(c30.954,11.558) 30.954,11.38 31.241,11.38 cw(c31.241,11.203) 31.241,11.025 31.004,11.025 ccw(c31.004,10.847) 31.004,10.669 31.241,10.669 cw(c31.241,10.491) 31.241,10.314 31.004,10.314 ccw(c31.004,10.136) 31.004,9.958 31.136,9.958 cw(c31.136,9.78) 31.136,9.602 31.004,9.602 ccw(c31.004,9.425) 31.004,9.247 31.059,9.247 cw(c31.059,9.069) 31.059,8.891 ccw(c31.059,8.713) 30.881,8.713 30.881,8.132 30.881,2.699 31.082,2.498 31.102,2.498 31.199,2.4 U2.G2@31.28,2.4
MDATA2: U1.69 U2.H7 | length 50.8
  Top Layer w0.102: U1.69@2.5,-5.275 2.497,-5.278 2.497,-8.613 4.725,-10.842 31.593,-10.842 32.474,-9.961 32.474,-8.488 32.474,-8.117 cw(c32.652,-8.117) 32.652,-7.939 32.655,-7.939 ccw(c32.655,-7.761) 32.655,-7.583 32.639,-7.583 cw(c32.639,-7.405) 32.639,-7.228 32.797,-7.228 ccw(c32.797,-7.05) 32.797,-6.872 32.639,-6.872 cw(c32.639,-6.694) 32.639,-6.516 32.797,-6.516 ccw(c32.797,-6.339) 32.797,-6.161 32.639,-6.161 cw(c32.639,-5.983) 32.639,-5.805 32.797,-5.805 ccw(c32.797,-5.627) 32.797,-5.45 32.537,-5.45 cw(c32.537,-5.272) 32.537,-5.094 32.797,-5.094 ccw(c32.797,-4.916) 32.797,-4.738 32.005,-4.738 cw(c32.005,-4.561) 32.005,-4.383 32.296,-4.383 ccw(c32.296,-4.205) 32.474,-4.205 32.474,-3.799 32.474,-0.999 32.414,-0.94 30.635,-0.94 30.48,-1.095 U2.H7@30.48,-1.6
MDATA3: U1.105 U2.H3 | length 50.8
  Top Layer w0.102: U1.105@5.925,1.75 8.492,1.75 10.96,4.218 10.96,7.526 16.066,12.631 16.185,12.631 16.236,12.631 ccw(c16.236,12.809) 16.413,12.809 16.413,12.833 cw(c16.591,12.833) 16.769,12.833 16.769,12.796 ccw(c16.947,12.796) 17.125,12.796 17.125,12.922 cw(c17.302,12.922) 17.48,12.922 17.48,12.796 ccw(c17.658,12.796) 17.836,12.796 17.836,12.922 cw(c18.014,12.922) 18.191,12.922 18.191,12.796 ccw(c18.369,12.796) 18.547,12.796 18.547,12.922 cw(c18.725,12.922) 18.903,12.922 18.903,12.797 ccw(c19.08,12.797) 19.258,12.797 19.258,12.922 cw(c19.436,12.922) 19.614,12.922 19.614,12.797 ccw(c19.792,12.797) 19.969,12.797 19.969,12.922 cw(c20.147,12.922) 20.325,12.922 20.325,12.797 ccw(c20.503,12.797) 20.681,12.797 20.681,12.922 cw(c20.858,12.922) 21.036,12.922 21.036,12.798 ccw(c21.214,12.798) 21.392,12.798 21.392,12.922 cw(c21.57,12.922) 21.747,12.922 21.747,12.799 ccw(c21.925,12.799) 22.103,12.799 22.103,12.922 cw(c22.281,12.922) 22.459,12.922 22.459,12.799 ccw(c22.636,12.799) 22.814,12.799 22.814,12.922 cw(c22.992,12.922) 23.17,12.922 23.17,12.799 ccw(c23.348,12.799) 23.525,12.799 23.525,12.922 cw(c23.703,12.922) 23.881,12.922 23.881,12.799 ccw(c24.059,12.799) 24.237,12.799 24.237,12.922 cw(c24.414,12.922) 24.592,12.922 24.592,12.799 ccw(c24.77,12.799) 24.948,12.799 24.948,12.922 cw(c25.126,12.922) 25.303,12.922 25.303,12.799 ccw(c25.481,12.799) 25.659,12.799 25.659,12.829 cw(c25.837,12.829) 26.015,12.829 26.015,12.799 ccw(c26.192,12.799) 26.37,12.799 cw(c26.548,12.799) 26.726,12.799 26.726,12.71 ccw(c26.904,12.71) 27.081,12.71 27.081,12.809 cw(c27.259,12.809) 27.437,12.809 ccw(c27.615,12.809) 27.615,12.631 28.437,12.631 28.731,12.631 29.651,11.712 29.651,4.357 30.119,3.889 30.119,2.131 30.423,1.827 30.423,1.657 U2.H3@30.48,1.6
MDATA4: U1.106 U2.H1 | length 50.8
  Top Layer w0.102: U1.106@5.275,2 8.419,2 10.731,4.313 10.731,7.76 16.397,13.425 28.492,13.425 28.761,13.156 28.797,13.12 ccw(c28.923,13.246) 29.049,13.12 29.342,13.414 cw(c29.468,13.288) 29.594,13.414 cw(c29.468,13.288) 29.594,13.162 29.238,12.807 ccw(c29.364,12.681) 29.238,12.555 ccw(c29.364,12.681) 29.49,12.555 29.552,12.617 cw(c29.677,12.492) 29.803,12.617 cw(c29.677,12.492) 29.803,12.366 ccw(c29.929,12.24) 29.803,12.114 29.863,12.055 30.302,12.055 30.471,12.055 30.471,11.988 30.471,11.582 cw(c30.293,11.582) 30.293,11.404 30.133,11.404 ccw(c30.133,11.226) 30.133,11.049 30.344,11.049 cw(c30.344,10.871) 30.344,10.693 30.133,10.693 ccw(c30.133,10.515) 30.133,10.337 30.344,10.337 cw(c30.344,10.16) 30.344,9.982 30.133,9.982 ccw(c30.133,9.804) 30.133,9.626 30.344,9.626 cw(c30.344,9.448) 30.344,9.271 30.133,9.271 ccw(c30.133,9.093) 30.133,8.915 30.399,8.915 cw(c30.399,8.737) 30.399,8.559 30.133,8.559 ccw(c30.133,8.382) 30.133,8.204 30.399,8.204 cw(c30.399,8.026) 30.399,7.848 30.133,7.848 ccw(c30.133,7.67) 30.133,7.493 30.399,7.493 cw(c30.399,7.315) 30.399,7.137 30.133,7.137 ccw(c30.133,6.959) 30.133,6.781 30.399,6.781 cw(c30.399,6.604) 30.399,6.426 30.133,6.426 ccw(c30.133,6.248) 30.133,6.07 30.399,6.07 cw(c30.399,5.892) 30.399,5.715 30.272,5.715 ccw(c30.272,5.537) 30.272,5.359 30.293,5.359 cw(c30.293,5.181) 30.471,5.181 30.471,3.209 U2.H1@30.48,3.2
MDATA5: U1.73 U2.H9 | length 50.8
  Top Layer w0.102: U1.73@3.5,-5.275 3.5,-8.323 5.103,-9.926 26.693,-9.926 28.09,-8.529 30.421,-8.529 30.48,-8.47 30.48,-8.252 30.421,-8.193 28.845,-8.193 28.786,-8.133 28.786,-7.879 28.845,-7.819 30.467,-7.819 30.527,-7.76 30.527,-7.506 30.467,-7.446 29.285,-7.446 29.225,-7.386 29.225,-7.118 29.285,-7.059 30.481,-7.059 30.541,-6.999 30.541,-6.735 30.481,-6.675 29.308,-6.675 29.248,-6.616 29.248,-6.368 29.308,-6.308 30.476,-6.308 30.536,-6.249 30.536,-6.039 30.476,-5.979 29.333,-5.979 29.273,-5.92 29.273,-5.649 29.333,-5.589 30.488,-5.589 30.547,-5.53 30.547,-5.253 30.488,-5.193 29.365,-5.193 29.305,-5.134 29.305,-4.882 29.365,-4.822 30.421,-4.822 30.48,-4.763 30.48,-4.502 30.421,-4.442 29.797,-4.442 29.737,-4.383 29.737,-4.15 29.797,-4.091 30.42,-4.091 30.48,-4.031 U2.H9@30.48,-3.2
MDATA6: U1.109 U2.F1 | length 50.8
  Top Layer w0.102: U1.109@5.925,2.75 8.184,2.75 10.046,4.612 10.046,8.453 16.008,14.416 31.702,14.416 32.08,14.038 32.08,14.021 32.08,13.971 ccw(c32.258,13.971) 32.258,13.793 32.301,13.793 cw(c32.301,13.615) 32.301,13.437 32.206,13.437 ccw(c32.206,13.259) 32.206,13.082 32.539,13.082 cw(c32.539,12.904) 32.539,12.726 32.206,12.726 ccw(c32.206,12.548) 32.206,12.37 32.539,12.37 cw(c32.539,12.193) 32.539,12.015 32.206,12.015 ccw(c32.206,11.837) 32.206,11.659 32.539,11.659 cw(c32.539,11.481) 32.539,11.304 32.206,11.304 ccw(c32.206,11.126) 32.206,10.948 32.539,10.948 cw(c32.539,10.77) 32.539,10.592 32.206,10.592 ccw(c32.206,10.415) 32.206,10.237 32.539,10.237 cw(c32.539,10.059) 32.539,9.881 32.206,9.881 ccw(c32.206,9.703) 32.206,9.526 32.362,9.526 cw(c32.362,9.348) 32.362,9.17 32.258,9.17 ccw(c32.258,8.992) 32.08,8.992 32.08,6.812 U2.F1@32.08,3.2
MDATA7: U1.70 U2.F9 | length 50.8
  Top Layer w0.102: U1.70@2.75,-5.925 2.753,-5.928 2.753,-8.439 4.85,-10.536 31.243,-10.536 31.303,-10.476 31.303,-10.417 31.303,-10.01 cw(c31.481,-10.01) 31.481,-9.832 31.978,-9.832 ccw(c31.978,-9.655) 31.978,-9.477 31.219,-9.477 cw(c31.219,-9.299) 31.219,-9.121 31.978,-9.121 ccw(c31.978,-8.943) 31.978,-8.766 31.369,-8.766 cw(c31.369,-8.588) 31.369,-8.41 31.978,-8.41 ccw(c31.978,-8.232) 31.978,-8.054 31.369,-8.054 cw(c31.369,-7.877) 31.369,-7.699 31.978,-7.699 ccw(c31.978,-7.521) 31.978,-7.343 31.369,-7.343 cw(c31.369,-7.165) 31.369,-6.988 31.978,-6.988 ccw(c31.978,-6.81) 31.978,-6.632 31.369,-6.632 cw(c31.369,-6.454) 31.369,-6.276 31.978,-6.276 ccw(c31.978,-6.099) 31.978,-5.921 31.369,-5.921 cw(c31.369,-5.743) 31.369,-5.565 31.876,-5.565 ccw(c31.876,-5.387) 31.876,-5.21 31.481,-5.21 cw(c31.481,-5.032) 31.303,-5.032 31.303,-4.475 32.08,-3.698 32.08,-3.569 U2.F9@32.08,-3.2
MDATA8: U1.66 U2.C8 | length 50.7
  Top Layer w0.102: U1.66@1.75,-5.925 1.758,-5.933 1.758,-9.18 4.741,-12.163 14.867,-12.163 17.051,-12.163 ccw(c17.051,-11.985) 17.229,-11.985 17.229,-11.952 cw(c17.407,-11.952) 17.584,-11.952 17.584,-12.082 ccw(c17.762,-12.082) 17.94,-12.082 17.94,-11.952 cw(c18.118,-11.952) 18.296,-11.952 18.296,-12.082 ccw(c18.473,-12.082) 18.651,-12.082 18.651,-11.952 cw(c18.829,-11.952) 19.007,-11.952 19.007,-12.082 ccw(c19.185,-12.082) 19.362,-12.082 19.362,-11.952 cw(c19.54,-11.952) 19.718,-11.952 19.718,-12.082 ccw(c19.896,-12.082) 20.074,-12.082 20.074,-11.952 cw(c20.251,-11.952) 20.429,-11.952 20.429,-12.082 ccw(c20.607,-12.082) 20.785,-12.082 20.785,-11.952 cw(c20.963,-11.952) 21.14,-11.952 21.14,-12.082 ccw(c21.318,-12.082) 21.496,-12.082 21.496,-11.952 cw(c21.674,-11.952) 21.852,-11.952 21.852,-11.985 ccw(c22.029,-11.985) 22.029,-12.163 22.305,-12.163 22.489,-12.163 22.856,-11.796 33.608,-11.796 34.088,-11.316 34.088,-2.792 U2.C8@34.48,-2.4
MDATA9: U1.112 U2.C2 | length 50.8
  Top Layer w0.102: U1.112@5.275,3.5 7.964,3.5 9.359,4.894 9.359,9.144 15.563,15.348 32.309,15.348 34.075,13.581 34.075,12.434 34.075,12.383 ccw(c34.253,12.383) 34.253,12.206 34.412,12.206 cw(c34.412,12.028) 34.412,11.85 34.173,11.85 ccw(c34.173,11.672) 34.173,11.494 34.412,11.494 cw(c34.412,11.317) 34.412,11.139 34.173,11.139 ccw(c34.173,10.961) 34.173,10.783 34.412,10.783 cw(c34.412,10.605) 34.412,10.428 34.253,10.428 ccw(c34.253,10.25) 34.075,10.25 34.075,4.231 34.075,2.805 U2.C2@34.48,2.4
MDATA10: U1.68 U2.D7 | length 50.8
  Top Layer w0.102: U1.68@2.25,-5.925 2.249,-8.797 4.599,-11.147 31.711,-11.147 32.167,-11.147 ccw(c32.167,-10.969) 32.344,-10.969 32.344,-10.699 cw(c32.522,-10.699) 32.7,-10.699 32.7,-10.969 ccw(c32.878,-10.969) 32.878,-11.147 33.118,-11.147 33.195,-11.069 33.279,-10.985 33.279,-10.232 33.279,-10.181 ccw(c33.101,-10.181) 33.101,-10.003 32.956,-10.003 cw(c32.956,-9.825) 32.956,-9.647 33.197,-9.647 ccw(c33.197,-9.47) 33.197,-9.292 33.01,-9.292 cw(c33.01,-9.114) 33.01,-8.936 33.197,-8.936 ccw(c33.197,-8.758) 33.197,-8.581 33.101,-8.581 cw(c33.101,-8.403) 33.101,-8.225 ccw(c33.101,-8.047) 33.279,-8.047 33.279,-7.635 33.279,-0.458 33.339,-0.399 34.006,-0.399 34.065,-0.458 34.065,-1.52 34.006,-1.58 33.7,-1.58 U2.D7@33.664,-1.616
MDATA11: U1.110 U2.D3 | length 50.8
  Top Layer w0.102: U1.110@5.275,3 8.111,3 9.816,4.705 9.816,8.698 15.843,14.726 31.977,14.726 33.021,13.682 33.021,8.962 32.454,8.395 32.454,7.4 32.454,7.349 ccw(c32.631,7.349) 32.631,7.172 32.735,7.172 cw(c32.735,6.994) 32.735,6.816 32.563,6.816 ccw(c32.563,6.638) 32.563,6.46 32.72,6.46 cw(c32.72,6.283) 32.72,6.105 32.563,6.105 ccw(c32.563,5.927) 32.563,5.749 cw(c32.563,5.571) 32.563,5.394 ccw(c32.563,5.216) 32.563,5.038 32.631,5.038 cw(c32.631,4.86) 32.631,4.682 ccw(c32.631,4.505) 32.454,4.505 32.454,4.187 32.454,4.022 32.636,3.839 33.209,3.839 33.269,3.78 33.269,2.011 U2.D3@33.68,1.6
MDATA12: U1.111 U2.D1 | length 50.8
  Top Layer w0.102: U1.111@5.925,3.25 8.037,3.25 9.587,4.8 9.587,8.933 15.69,15.036 32.151,15.036 33.358,13.829 33.358,9.189 33.358,9.138 ccw(c33.536,9.138) 33.536,8.96 33.593,8.96 cw(c33.593,8.782) 33.593,8.605 33.504,8.605 ccw(c33.504,8.427) 33.504,8.249 33.593,8.249 cw(c33.593,8.071) 33.593,7.893 33.395,7.893 ccw(c33.395,7.716) 33.395,7.538 33.593,7.538 cw(c33.593,7.36) 33.593,7.182 33.395,7.182 ccw(c33.395,7.004) 33.395,6.827 33.593,6.827 cw(c33.593,6.649) 33.593,6.471 33.395,6.471 ccw(c33.395,6.293) 33.395,6.115 33.593,6.115 cw(c33.593,5.938) 33.593,5.76 33.395,5.76 ccw(c33.395,5.582) 33.395,5.404 33.495,5.404 cw(c33.495,5.226) 33.495,5.049 33.395,5.049 ccw(c33.395,4.871) 33.395,4.693 33.536,4.693 cw(c33.536,4.515) 33.536,4.337 ccw(c33.536,4.16) 33.358,4.16 33.358,4.14 33.68,3.818 33.68,3.734 U2.D1@33.68,3.2
MDATA13: U1.67 U2.D9 | length 50.8
  Top Layer w0.102: U1.67@2,-5.275 2,-8.979 4.491,-11.469 4.518,-11.469 7.414,-11.469 cw(c7.414,-11.647) 7.592,-11.647 ccw(c7.77,-11.647) 7.948,-11.647 7.948,-11.629 cw(c8.125,-11.629) 8.303,-11.629 ccw(c8.481,-11.629) 8.659,-11.629 cw(c8.837,-11.629) 9.014,-11.629 9.014,-11.663 ccw(c9.192,-11.663) 9.37,-11.663 9.37,-11.629 cw(c9.548,-11.629) 9.726,-11.629 9.726,-11.68 ccw(c9.903,-11.68) 10.081,-11.68 10.081,-11.629 cw(c10.259,-11.629) 10.437,-11.629 10.437,-11.68 ccw(c10.615,-11.68) 10.792,-11.68 10.792,-11.629 cw(c10.97,-11.629) 11.148,-11.629 11.148,-11.68 ccw(c11.326,-11.68) 11.504,-11.68 11.504,-11.629 cw(c11.681,-11.629) 11.859,-11.629 11.859,-11.68 ccw(c12.037,-11.68) 12.215,-11.68 12.215,-11.629 cw(c12.393,-11.629) 12.57,-11.629 12.57,-11.68 ccw(c12.748,-11.68) 12.926,-11.68 12.926,-11.629 cw(c13.104,-11.629) 13.282,-11.629 13.282,-11.68 ccw(c13.459,-11.68) 13.637,-11.68 13.637,-11.629 cw(c13.815,-11.629) 13.993,-11.629 13.993,-11.68 ccw(c14.171,-11.68) 14.348,-11.68 14.348,-11.629 cw(c14.526,-11.629) 14.704,-11.629 14.704,-11.68 ccw(c14.882,-11.68) 15.06,-11.68 15.06,-11.629 cw(c15.237,-11.629) 15.415,-11.629 15.415,-11.68 ccw(c15.593,-11.68) 15.771,-11.68 15.771,-11.629 cw(c15.949,-11.629) 16.126,-11.629 16.126,-11.68 ccw(c16.304,-11.68) 16.482,-11.68 16.482,-11.647 cw(c16.66,-11.647) 16.66,-11.469 16.711,-11.469 33.261,-11.469 33.68,-11.051 U2.D9@33.68,-3.2
MDATA14: U1.114 U2.B1 | length 50.8
  Top Layer w0.102: U1.114@5.275,4 7.818,4 9.075,5.258 9.075,9.305 15.43,15.66 32.515,15.66 35.28,12.895 35.28,9.5 35.28,9.093 cw(c35.102,9.093) 35.102,8.915 35.082,8.915 ccw(c35.082,8.738) 35.082,8.56 35.164,8.56 cw(c35.164,8.382) 35.164,8.204 35.082,8.204 ccw(c35.082,8.026) 35.082,7.849 35.164,7.849 cw(c35.164,7.671) 35.164,7.493 35.082,7.493 ccw(c35.082,7.315) 35.082,7.137 35.164,7.137 cw(c35.164,6.96) 35.164,6.782 35.082,6.782 ccw(c35.082,6.604) 35.082,6.426 35.164,6.426 cw(c35.164,6.248) 35.164,6.071 35.082,6.071 ccw(c35.082,5.893) 35.082,5.715 35.102,5.715 cw(c35.102,5.537) 35.28,5.537 35.28,3.543 U2.B1@35.28,3.2
MDATA15: U1.65 U2.B9 | length 50.8
  Top Layer w0.102: U1.65@1.5,-5.275 1.52,-5.295 1.52,-9.387 4.698,-12.564 22.658,-12.564 23.115,-12.107 34.098,-12.107 34.535,-11.67 34.535,-6.922 34.535,-6.515 cw(c34.713,-6.515) 34.713,-6.338 35.162,-6.338 ccw(c35.162,-6.16) 35.162,-5.982 34.604,-5.982 cw(c34.604,-5.804) 34.604,-5.626 34.927,-5.626 ccw(c34.927,-5.449) 34.927,-5.271 34.604,-5.271 cw(c34.604,-5.093) 34.604,-4.915 35.113,-4.915 ccw(c35.113,-4.737) 35.113,-4.56 cw(c35.113,-4.382) 34.987,-4.256 35.28,-3.963 35.28,-3.745 U2.B9@35.28,-3.2
MISO: U1.26 U3.2 | length 29.5
  Top Layer w0.102: U3.2@-24.656,-11.756 v1@-24.656,-10.149 ; U1.26@-5.275,-1.5 -4.742,-1.5 v1(-4.725,-1.484)
  Bottom Layer w0.102: v1(-24.649,-10.149) -24.649,-3.629 -24.29,-3.27 -8.613,-3.27 -6.827,-1.484 v1(-4.725,-1.484)
MOSI: R25.2 R26.2 U1.27 U3.5 | length 19.3
  Top Layer w0.102: U3.5@-22.116,-6.256 -22.116,-4.111 -21.839,-3.834 -8.856,-3.834 -6.772,-1.75 U1.27@-5.925,-1.75
NetC10_1: C10.1 C11.2 L3.1
NetC10_2: C10.2 L4.2
NetC11_1: C11.1 C17.2 L5.1 L8.2
NetC12_2: C12.2 L1.1 L4.1 U1.5 U1.6
NetC15_1: C15.1 L2.1 L7.1 U1.3 U1.4
NetC16_1: C16.1 C20.1 L8.1
NetC16_2: C16.2 L7.2
NetC17_1: C17.1 C18.1 L5.2 L6.1
NetC19_1: C19.1 L6.2 P1.2
NetC23_2: C23.2 U1.151 X1.3
NetD1_A: D1.A R23.1
NetD2_A: D2.A R24.1
NetL9_1: L9.1 U1.118 U1.119
NetR3_1: R3.1 U1.25 | length 18
  Top Layer w0.102: R3.1@-23.224,-2.85 -23.167,-2.907 -8.867,-2.907 -7.21,-1.25 U1.25@-5.925,-1.25
NetR7_2: R7.2 U1.62 | length 7.3
  Top Layer w0.102: U1.62@0.75,-5.925 0.75,-5.992 0.75,-6.275 ccw(c0.928,-6.275) 0.928,-6.453 1.038,-6.453 cw(c1.038,-6.631) 1.038,-6.808 0.928,-6.808 ccw(c0.928,-6.986) 0.75,-6.986 0.75,-7.393 0.75,-11.701 1.077,-12.028 1.157,-12.028 R7.2@1.435,-12.306
NetR8_2: R8.2 U1.61 | length 7.3
  Top Layer w0.102: R8.2@-0.065,-12.306 -0.065,-12.23 0.138,-12.027 0.156,-12.027 0.5,-11.683 U1.61@0.5,-5.275
NetR9_2: R9.2 U1.137
NetR11_2: R11.2 U1.59
NetR12_2: R12.2 U1.39
NetR19_2: R19.2 U3.7
NetR20_1: R20.1 U3.3 | length 2.3
  Top Layer w0.102: R20.1@-23.41,-13.933 -23.386,-13.909 U3.3@-23.386,-11.756 U3.3@-23.386,-11.643
NetR21_2: R21.2 R22.1 TC10.1
NetR45_2: R45.2 SD1.5
PERST_N: R35.2 R36.2 U1.135
PWM_CH0: U1.45
PWM_CH1: U1.46
REF_CLK0: U1.136
RXI0_N: U1.34
RXI0_P: U1.33
RXI1_N: U1.44
RXI1_P: U1.43
SD_CD: R10.2 R44.2 SD1.9 U1.50
SD_CLK: R45.1 U1.54
SD_CMD: R41.2 SD1.3 U1.55
SD_D0: R42.2 SD1.7 U1.52
SD_D1: R43.2 SD1.8 U1.51
SD_D2: R39.2 SD1.1 U1.56
SD_D3: R40.2 SD1.2 U1.57
SD_WP: R6.2 U1.49
SOC_1.2VD_MT7688: C48.1 C52.1 C53.2 C54.1 C55.1 C56.1 C57.1 L9.2 TC4.1 TC8.1 U1.22 U1.58 U1.89 U1.91 U1.122 U1.131 U1.145 | length 4.9
  Top Layer w0.178: U1.89@5.925,-2.25 5.931,-2.244 6.125,-2.244 6.161,-2.209 6.599,-2.209 6.791,-2.017 v1(6.864,-2.017) ; U1.91@5.925,-1.75 5.931,-1.756 6.125,-1.756 6.155,-1.786 6.56,-1.786 6.788,-2.014 6.382,-2.014 v1(6.379,-2.012)
  Top Layer w0.254: U1.22@-5.275,-0.5 -4.384,-0.5 v1@-4.378,-0.494 ; v1@-2,4.745 U1.145@-2,5.275 ; -0.25,-6.455 U1.58@-0.25,-5.925 ; U1.122@3.75,5.925 3.752,5.927 3.752,6.457 v1(3.754,6.459)
  other v1: -0.662,-6.962 -4.362,-0.465 -2.002,4.743
SPI_CS1: R29.2 R31.2 U1.24 | length 4.3
  Top Layer w0.102: U1.24@-5.275,-1 -4.446,-1 v1(-4.13,-1.316)
  Bottom Layer w0.102: -6.956,-0.919 -4.526,-0.919 v1(-4.13,-1.316)
TXO0_N: U1.36
TXO0_P: U1.35
TXO1_N: U1.42
TXO1_P: U1.40
UART_RXD0: U1.31
UART_RXD1: U1.148
UART_RXD2: U1.47
UART_TXD0: R33.2 R34.2 U1.30
UART_TXD1: R30.2 R32.2 U1.147
UART_TXD2: U1.48
USB_D_N: C43.1 R8.1 | length 1.4
  Top Layer w0.102: C43.1@-1.435,-13.593 -0.132,-13.593 R8.1@-0.065,-13.525
USB_D_P: C42.1 R7.1 | length 1.4
  Top Layer w0.102: R7.1@1.281,-13.527 1.309,-13.555 C42.1@2.658,-13.555
WF_SX_3V3_IN: C13.2 C14.2 R2.2 U1.154
WIFI_RESET: U1.139
WLED_N: D1.K U1.144
pads on no net: C28.1 U1.9 U1.11 U1.12 U1.37 U1.126 U1.127 U1.129 U1.130 U1.132 U1.133 U1.140 U1.141 U1.153 U2.A2 U2.A8 U2.E2 U2.E8 U2.R3 U2.R7
copper on no net: | length 1.5
  Top Layer w0.254: 29.68,-1.6 v1@30.025,-1.255 ; 32.88,-1.6 v1@32.88,-1.112 ; 33.68,2.4 v1(34.025,2.055)
  other v1: 30.055,-1.255 32.901,-1.091

## Silkscreen, mask and mechanical layers (free items; w line width, h text height)
Mechanical 1:
  the board outline again, w0.01

## Text inside footprints (layer, text, board x,y; h text height)
SD1: Top Overlay "Cd" at 90.846,-24.205 h0.76; Top Overlay "8" at 91.405,-22.859 h0.76 r90; Top Overlay "7" at 91.43,-21.741 h0.76 r90; Top Overlay "6" at 91.43,-20.674 h0.76 r90; Top Overlay "5" at 91.43,-19.607 h0.76 r90; Top Overlay "4" at 91.456,-18.541 h0.76 r90; Top Overlay "3" at 91.456,-17.347 h0.76 r90; Top Overlay "2" at 91.456,-16.28 h0.76 r90; Top Overlay "1" at 91.481,-15.188 h0.76 r90
TC1: Bottom Overlay "+" at 22.53,2.941 h0.76 r270
TC2: Bottom Overlay "+" at -2.946,-3.5 h0.76 r90
TC3: Top Overlay "+" at 8.203,4.084 h0.76 r90
TC4: Top Overlay "+" at 0.696,13.359 h0.76
TC5: Bottom Overlay "+" at 2.353,5.624 h0.76 r270
TC6: Top Overlay "+" at -36.364,58.394 h0.76 r90
TC7: Top Overlay "+" at -33.116,58.394 h0.76 r90
TC8: Top Overlay "+" at 0.563,16.148 h0.76
TC9: Bottom Overlay "+" at 7.623,3.948 h0.76 r270
TC10: Top Overlay "+" at 30.724,37.572 h0.76 r90